# Altium PCB [OLD]Payload_Switch_Board.PcbDoc
Units mil, origin at the board's own origin, x right, y up, seen from the top; angles counter-clockwise.
Board outline 1180 x 685 mil, 2 copper layers (Top Layer, Bottom Layer); 6 components, 7 nets, 22 pads, 0 vias.
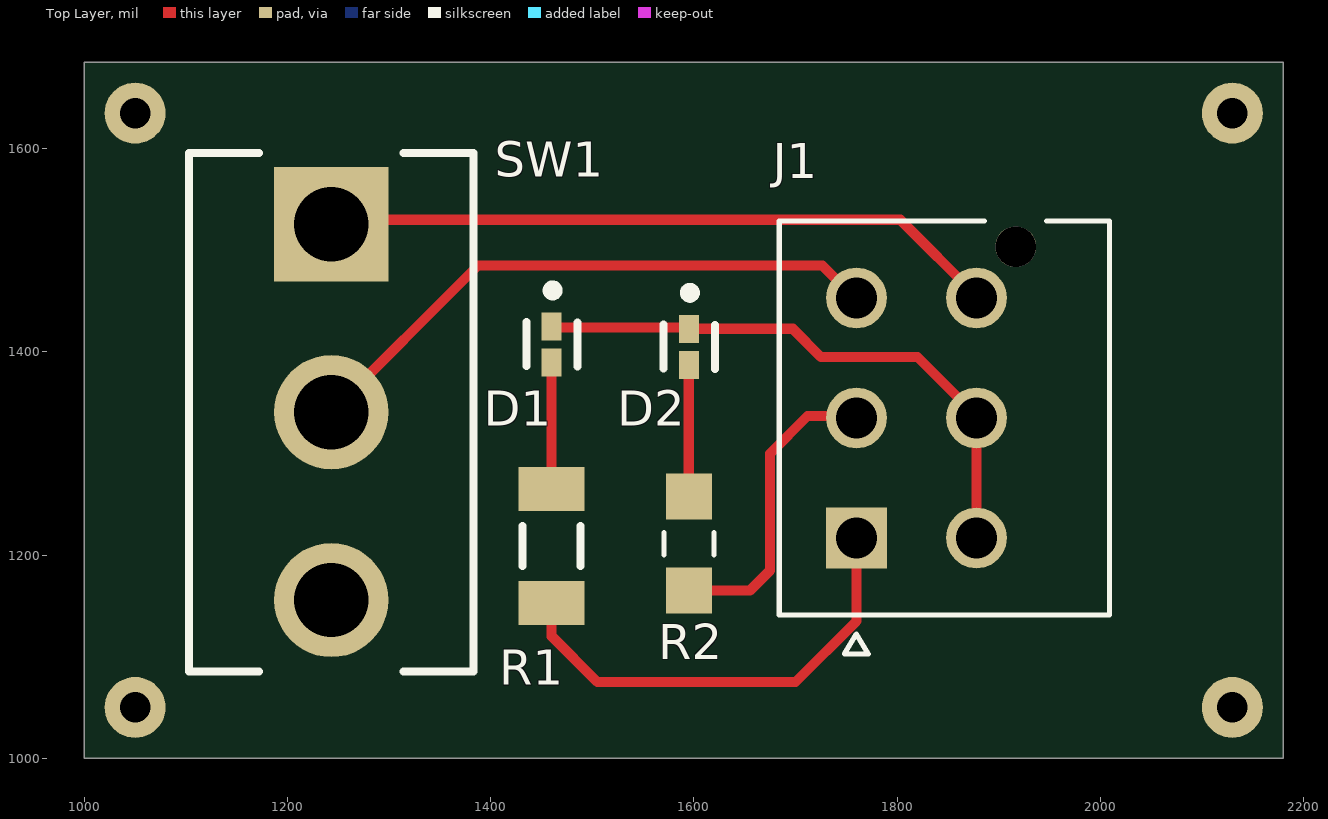
[diagram p0: Top Layer view]
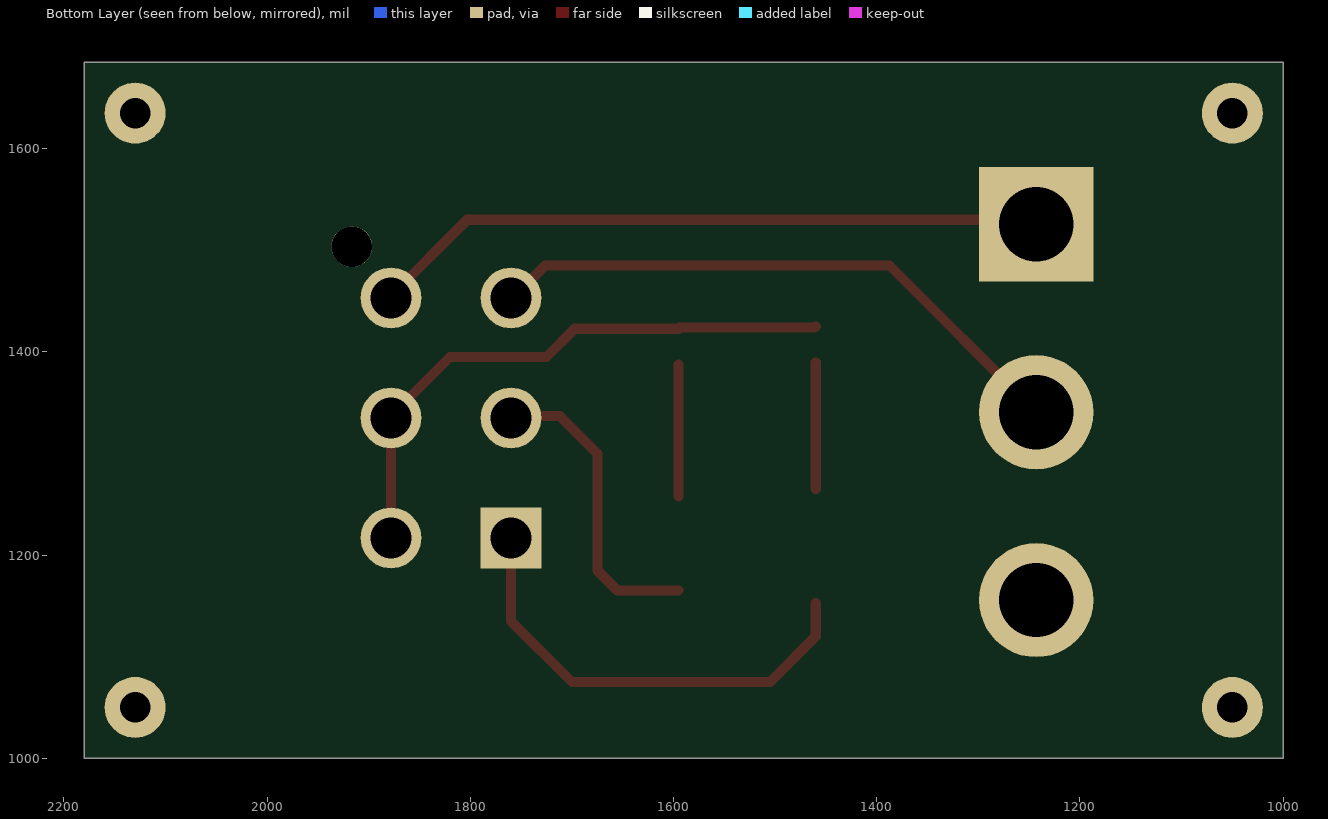
[diagram p1: Bottom Layer view, seen from below]
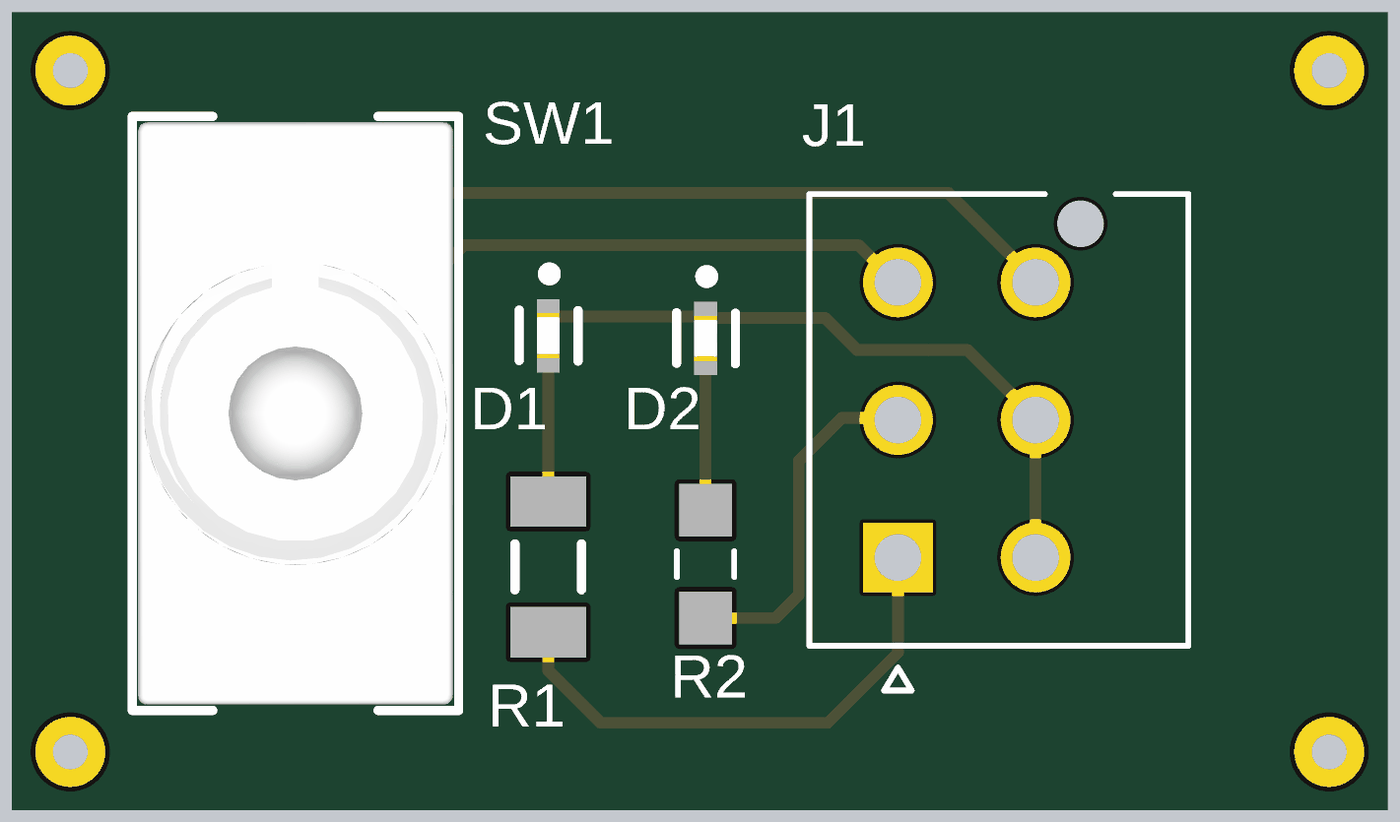
[diagram p2: 3D render of the assembled board from above, using the file's embedded part models]

## Layer stack, top to bottom
Top Solder: solder mask 0.4, Solder Resist, Dk 3.5
Top Layer: signal copper 1.4
Dielectric 1: dielectric 12.6, FR-4, Dk 4.8
Bottom Layer: signal copper 1.4
Bottom Solder: solder mask 0.4, Solder Resist, Dk 3.5

## Board outline
1000,1000 2180,1000 2180,1685 1000,1685

## Design rules (kind name [scope] priority, off if disabled: settings)
Clearance Clearance_1 [All] p1: gap=10 ignorepadtopadclearanceinfootprint=FALSE except(0: Arc-Hole Track-Hole SMDPad-Hole THPad-Hole Via-Hole Fill-Hole Poly-Hole Region-Hole Text-Hole)
Clearance [All] p2: gap=10 ignorepadtopadclearanceinfootprint=FALSE except(0: Arc-Hole Track-Hole SMDPad-Hole THPad-Hole Via-Hole Fill-Hole Poly-Hole Region-Hole Text-Hole)
PolygonConnect [All] p1: connectstyle=Relief reliefconductorwidth=10 reliefentries=4 polygonreliefangle="90 Angle" airgapwidth=10
RoutingVias [All] p1: holewidth=28 width=50 viastyle="Through Hole" minholewidth=28 minwidth=50 maxholewidth=28 maxwidth=50
SolderMaskExpansion [All] p1: expansion=4 istentingtop=FALSE
Width [All] p1: maxlimit=10 minlimit=10 preferedwidth=10
30 further rules are at their usual default settings.

## Components (designator, comment, footprint, x,y, rotation, side; value= is the part's Value field where it differs from the comment)
D1 "LED7.4" FP-APHHS1005CGCK-MFG 1460,1407.28 r270 top
D2 "LED3.3" FP-APHHS1005CGCK-MFG 1595,1405 r270 top
J1 "2068320601" MOLEX_2068320601 1760,1216.89 r270 top
R1 "261R" RESC3216X70X50NL05T20 1460,1208.9 r90 top
R2 "59R" RES_ERJP06F59R0V 1595,1211.26 r270 top
SW1 "A101SYCB04" FP-A101SYCB04-MFG 1243.11,1340.63 r0 top (schematic designator SW?)

## Footprints (in the part's own frame and the unit in brackets; to place one, negate y for a bottom-side part, rotate by r counter-clockwise, add the part's x,y. Pads: shape width x height; smd on the part's side, far side on the other; paste and mask are expansions set on the pad)
FP-A101SYCB04-MFG [mil]
  rect 112.37x112.37 hole 73 paste-39370.1 mask+0: 1(0,185)
  round 112.37 hole 73 paste-39370.1 mask+0: 2(0,0) 3(0,-185)
  silkscreen extent -140,-255 140,255, body extent -144,-259 144,259, height 10
FP-APHHS1005CGCK-MFG [mm]
  rect 0.7x0.5 smd paste+0 mask+0: 1(-0.45,0) 2(0.45,0)
  silkscreen extent -1.47,-0.63 0.55,0.65, body extent -0.9,-0.4 0.9,0.4, height 0.25
MOLEX_2068320601 [mm]
  rect 1.52x1.52 hole 1.02 mask+0.076: 1(0,0)
  round 1.52 hole 1.02 mask+0.076: 2(-3,0) 3(-6,0) 4(0,3) 5(-3,3) 6(-6,3)
  round 1.02 hole 1.02 unplated mask+0.076: ""(-7.28,3.98)
  silkscreen extent -7.93,-1.93 2.9,6.33
RES_ERJP06F59R0V [mm]
  rect 1.15x1.15 smd: 1(-1.175,0) 2(1.175,0)
  silkscreen extent -0.28,-0.63 0.28,0.63
RESC3216X70X50NL05T20 [mm] "Chip Resistor, 2-Leads, Body 3.20x1.60mm, IPC Medium Density"
  rect 1.1x1.65 smd: 1(-1.425,0) 2(1.425,0)
  silkscreen extent -0.5,-0.72 0.5,0.72, body extent -1.63,-0.82 1.62,0.82, height 0.7

## Part data
D1 D2: library part CMP-44529-000044-1, "LED GREEN CLEAR CHIP SMD", Case Code (Imperial)=0402, Case Code (Metric)=1005, Color=Green, Forward Current=20mA, Forward Voltage=2.1V, Lens Color=Clear, Max Operating Temperature=85°C, Min Operating Temperature=-40°C, Package Quantity=2000, Case/Package=0402, Dominant Wavelength=570nm, Height=0.6mm, Illumination Color=Green, Lead Free="Lead Free", Length=1mm, Lens Style=Clear, Luminous Intensity=50mcd, Mount="Surface Mount", Number of LEDs=1, Number of Pins=2, Packaging="Tape and Reel", Test Current=20mA, Viewing Angle=120°, Wavelength=570nm, Width=0.5mm
J1: Package=None, Availability=Unavailable, MP=2068320601, Price=None
R1: library part CMP-2003-00255-1, Manufacturer=Panasonic, Part Number=ERJ-8ENF2610V
R2: library part ERJP06F59R0V, Package=None, Availability=Unavailable, MP=ERJP06F59R0V, Price=None
SW1: library part CMP-03408-000017-1, "SWITCH TOGGLE SPDT 0.4VA 20V", Actuator Color=Chrome, Contact Current Rating=400mA, Contact Resistance=10mR, Flammability Rating="UL94 V-1", Insulation Resistance=30MR, Max Operating Temperature=85°C, Max Voltage Rating (AC)=20V, Min Operating Temperature=-30°C, Package Quantity=100, Power Rating=400mW, Actuator Length=10.41mm, Actuator Material=Phenolic, Actuator Type="Standard Round", Contact Material=Copper, Contact Plating=Gold, Depth=6.86mm, Electrical Life=6000Cycles, ELV=Compliant, Illumination Type=Non-Illuminated, Lead Free="Lead Free", Max Voltage Rating (DC)=20V, Mount=Panel, Number of Poles=1, Number of Positions=2, Orientation=Straight, Packaging=Bulk, Radiation Hardening=No, REACH SVHC="No SVHC", RoHS Compliant=Yes, Series="Gemini A", Switch Function=On-On, Termination="PC Pins", Throw Configuration=SPDT, Voltage Rating (AC)=20V, Voltage Rating (DC)=20V

## Free pads (board coordinates)
  round 60 hole 30: 4(1050,1635) 5(1050,1050) 6(2130,1050) 7(2130,1635)

## Nets (pads, with @x,y where several pads share a name; then routed paths per layer and width w, separated by ;. In a path a pad name is that pad's centre, name@x,y a point inside that pad or via, vN(x,y) a via of type N, cw(c..) or ccw(c..) an arc to the next point about the centre after c; other vN are vias at no path point)
NetD1_1: D1.1 D2.1 J1.4 J1.5 | length 572.7
  Top Layer w10: D1.1 1461.14,1423.86 1593.86,1423.86 D2.1 1697.28,1422.72 1725,1395 1820,1395 1878.11,1336.89 J1.4@1878.11,1218.78
NetD1_2: D1.2 R1.2 | length 124.6
  Top Layer w10: R1.2 D1.2
NetD2_2: D2.2 R2.1 | length 129.8
  Top Layer w10: R2.1 D2.2
NetJ1_1: J1.1 R1.1 | length 460.1
  Top Layer w10: R1.1 1460,1120 1505,1075 1700,1075 1760,1135 J1.1@1760,1218.78
NetJ1_2: J1.2 R2.2 | length 303.6
  Top Layer w10: R2.2 1655,1165 1675,1185 1675,1300 1711.89,1336.89 J1.2@1760,1336.89
NetJ1_3: J1.3 SW1.2 | length 589.1
  Top Layer w10: SW1.2 1387.48,1485 1726.47,1485 1756.47,1455 J1.3@1760,1455
NetJ1_6: J1.6 SW1.1 | length 667.9
  Top Layer w10: SW1.1 1247.48,1530 1803.11,1530 J1.6@1878.11,1455
pads on no net: J1. SW1.3

## Silkscreen, mask and mechanical layers (free items; w line width, h text height)
Top Component Center:
  text "Payload Switch Board Sept 2021" at 1490,1026.66 h20